# Altium PCB LCD_Dev_PCB1.PcbDoc
Units mil, origin at the board's own origin, x right, y up, seen from the top; angles counter-clockwise.
Board outline 2470 x 1570 mil, 4 copper layers (Top Layer, GND, 3.3V, Bottom Layer), stack 30.634 mil thick; 60 components, 58 nets, 366 pads, 69 vias.
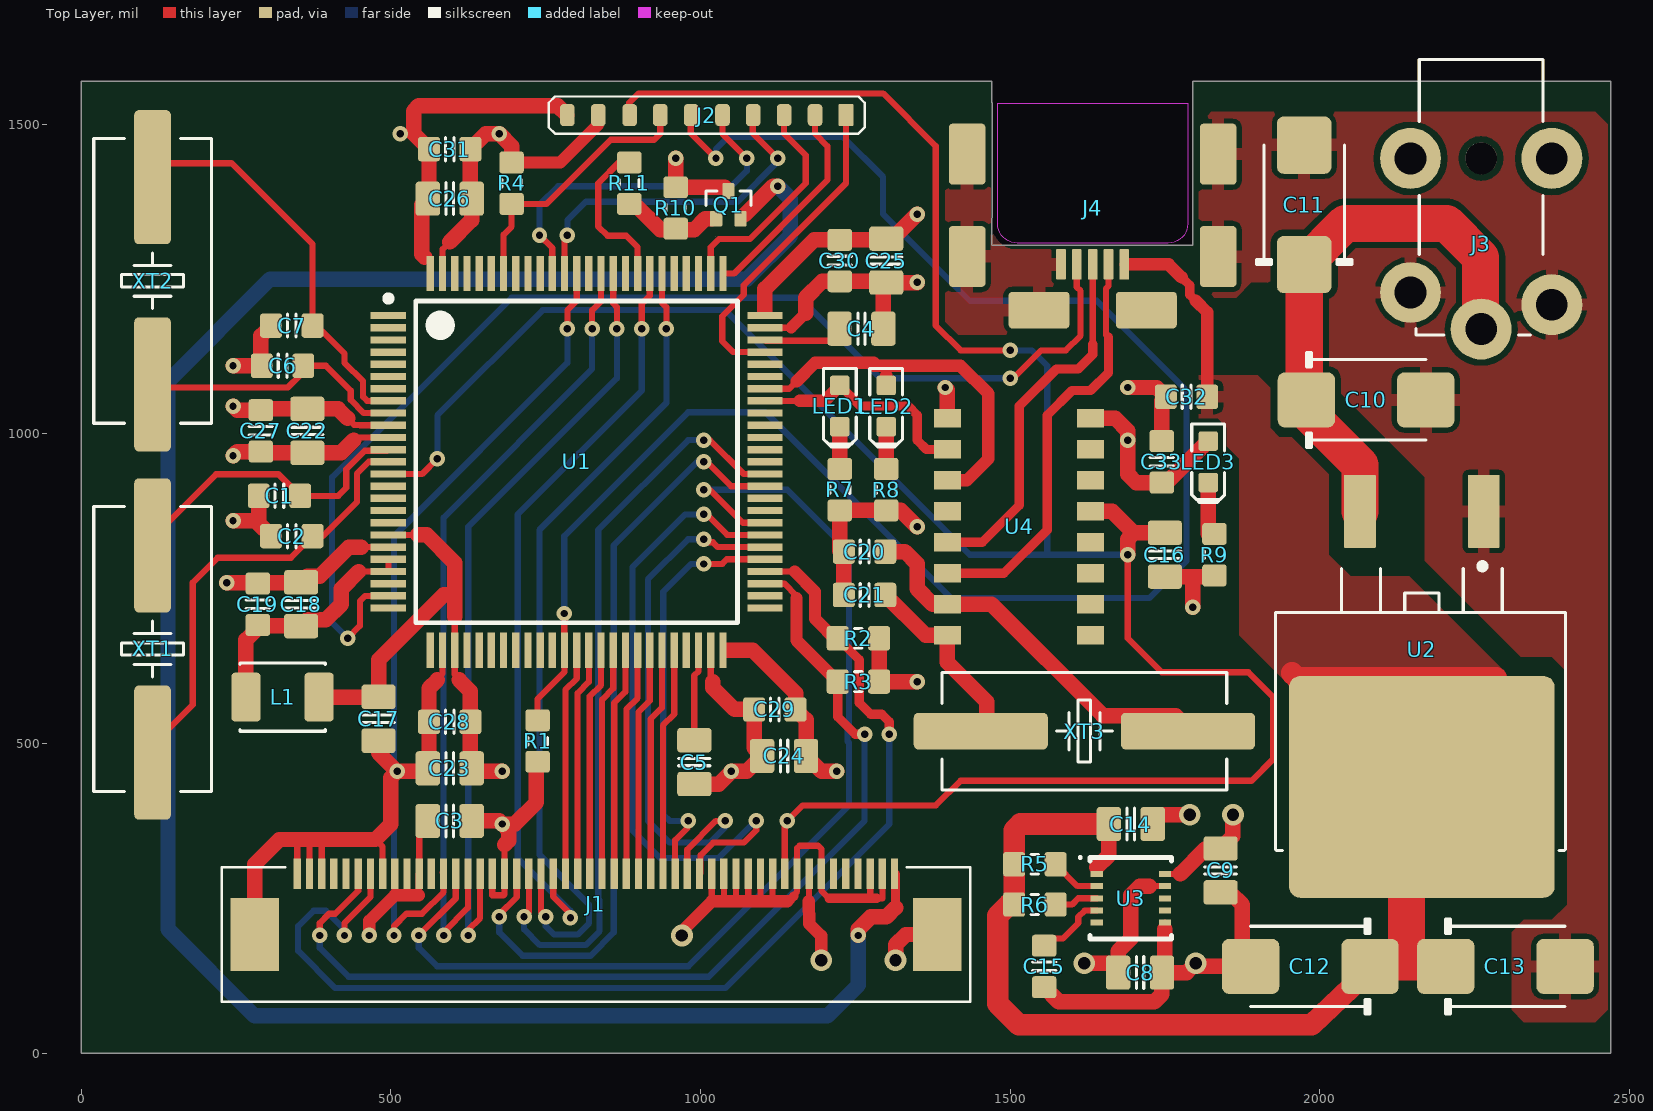
[diagram p0: Top Layer view]
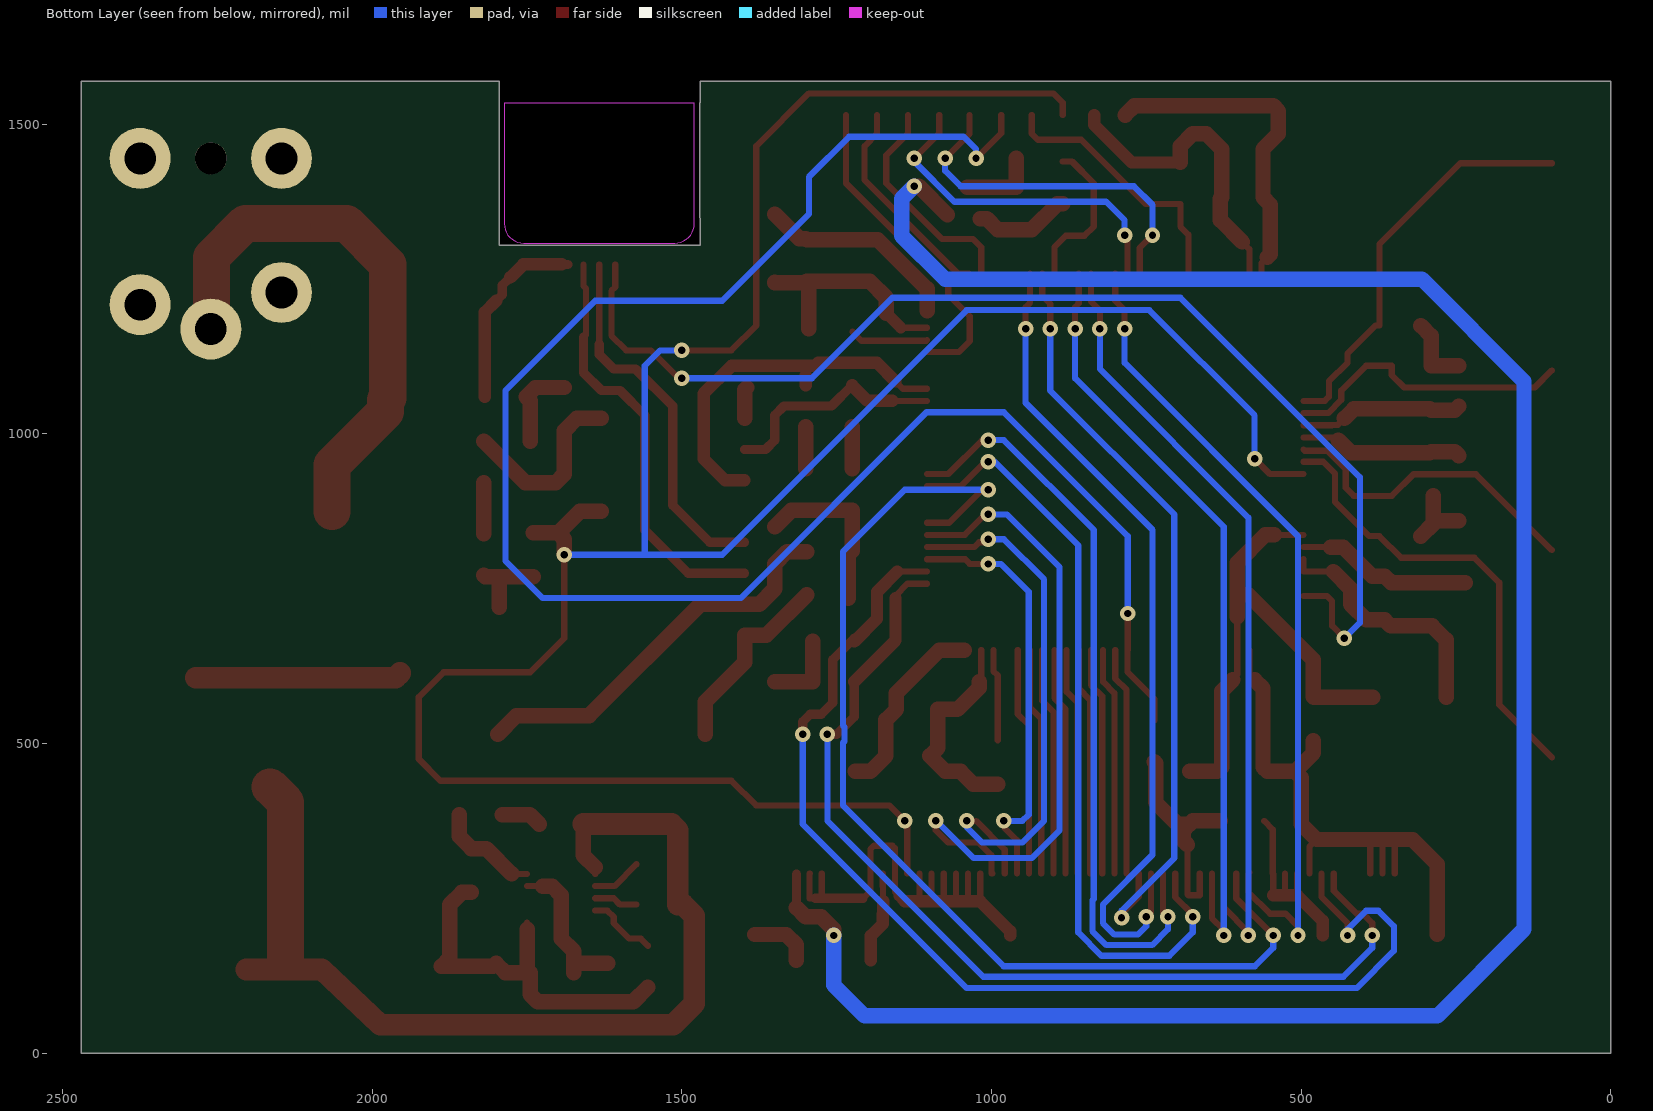
[diagram p1: Bottom Layer view, seen from below]
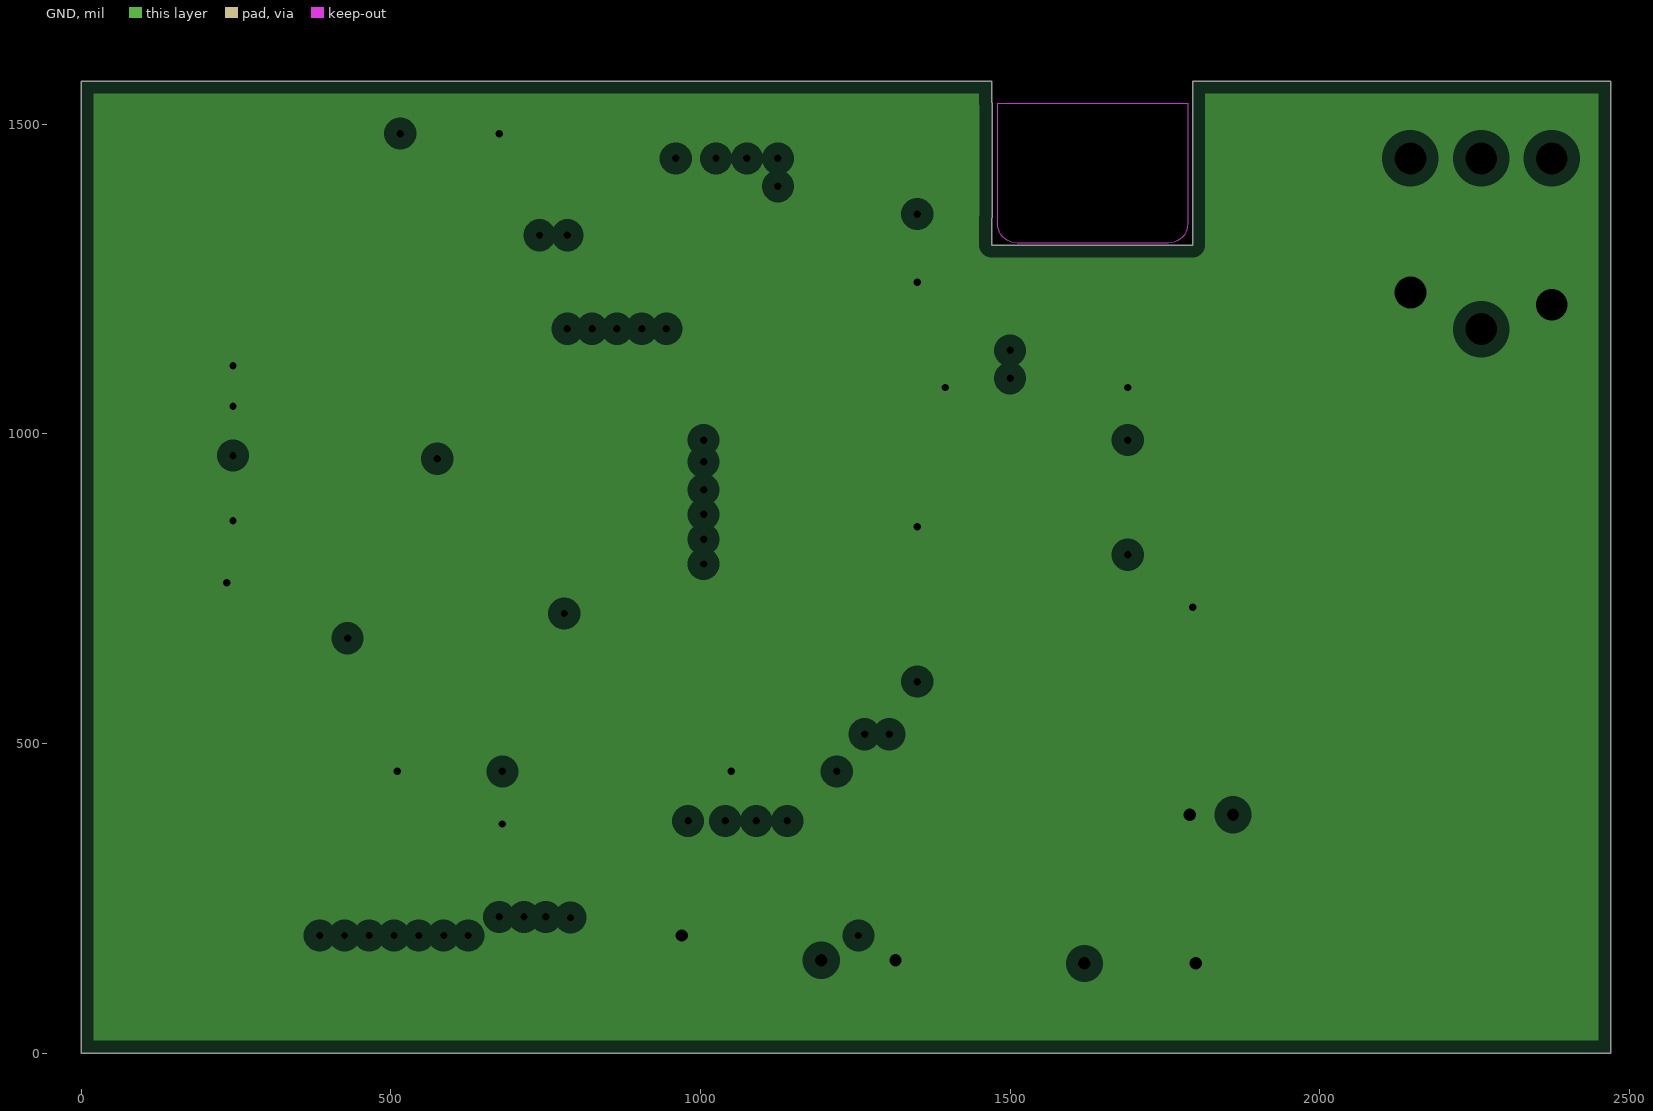
[diagram p2: GND, clearances drawn from the general rule]
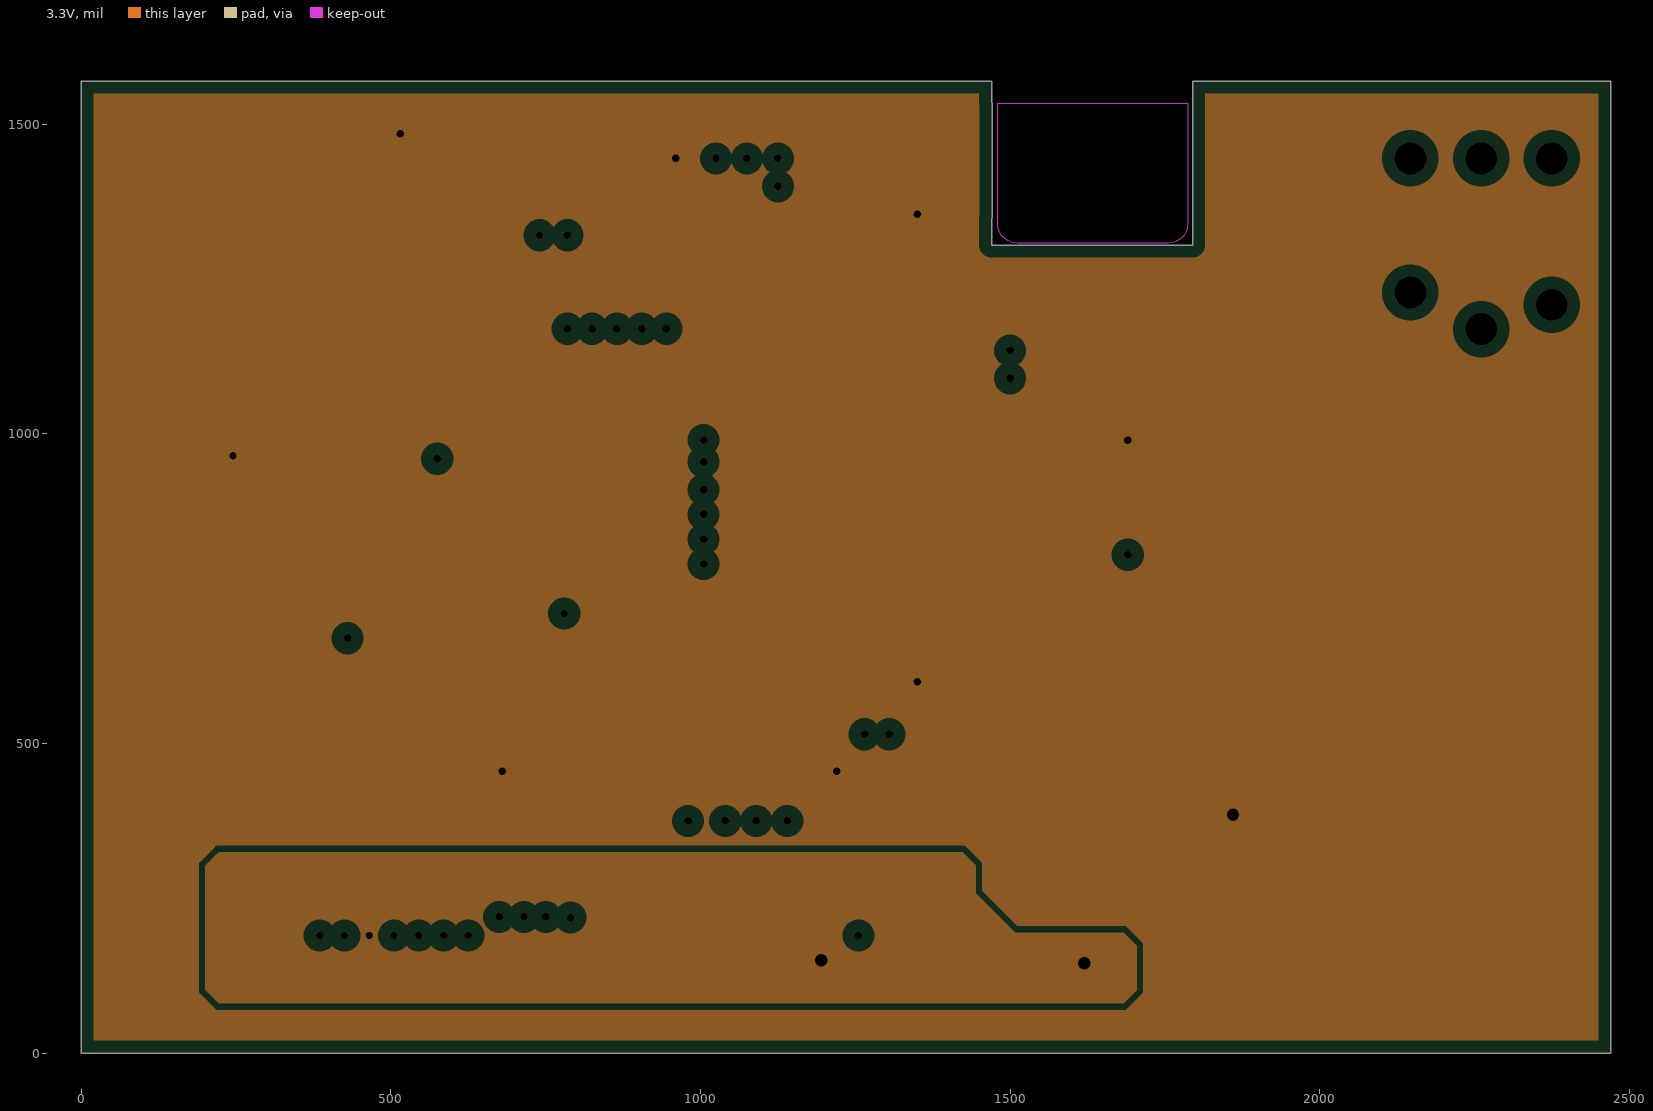
[diagram p3: 3.3V, clearances drawn from the general rule]
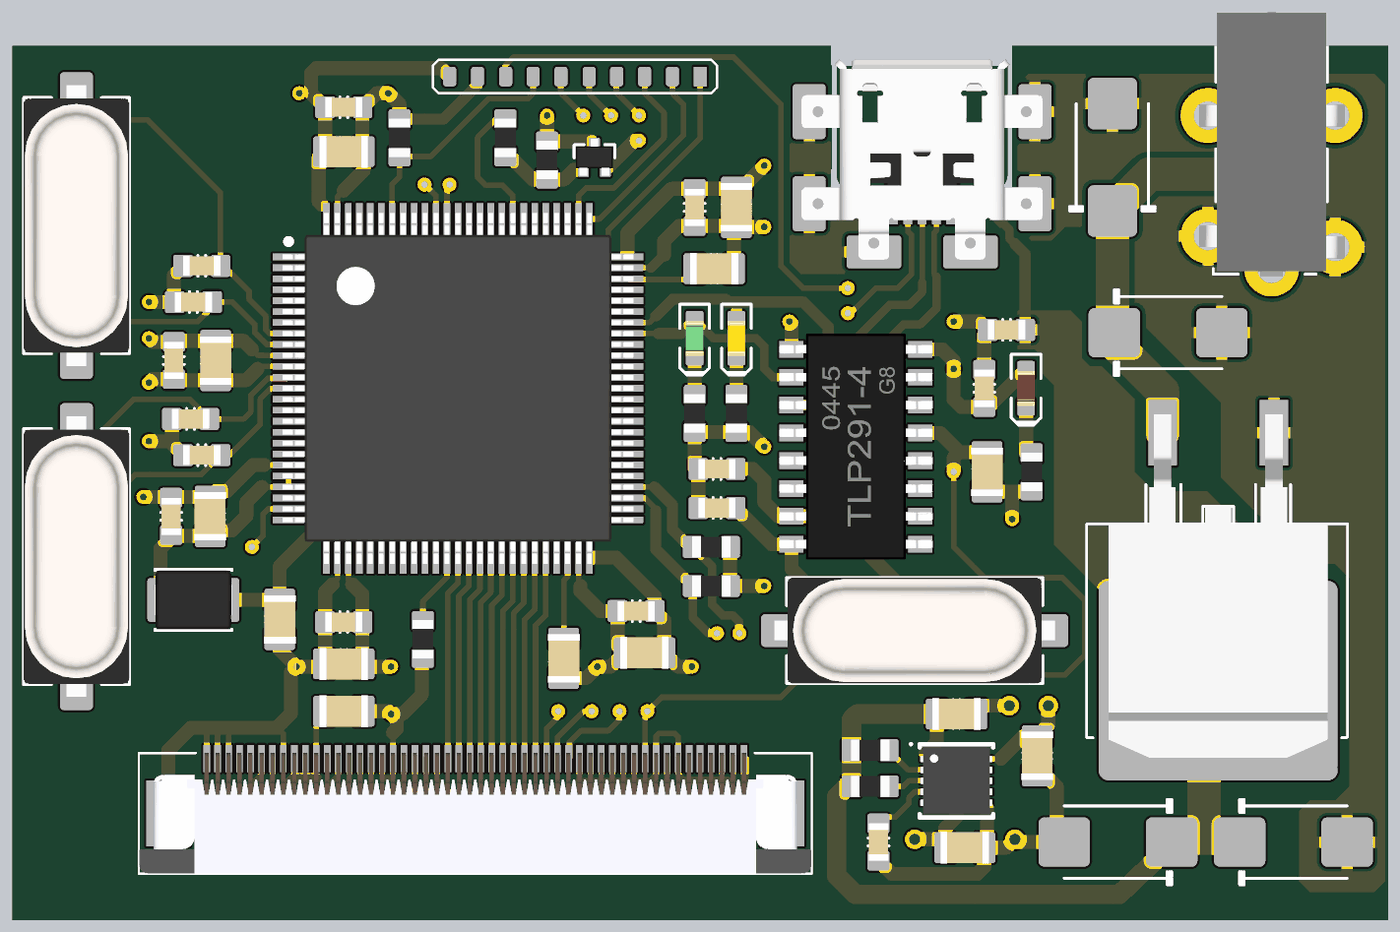
[diagram p4: 3D render of the assembled board from above, using the file's embedded part models]

## Layer stack, top to bottom
Top Solder: solder mask 0.4, Solder Resist, Dk 3.5
Top Layer: signal copper 1.4
Dielectric 1: core 10, FR-4, Dk 4.2
GND: plane copper 1.417, net GND
Dielectric 3: prepreg 5, Dk 4.2
3.3V: plane copper 1.417, net 3.3V
Dielectric 2: core 10, Dk 4.2
Bottom Layer: signal copper 1.4
Bottom Solder: solder mask 0.4, Solder Resist, Dk 3.5

## Board outline
0,0 2470,0 2470,1570 1795,1570 1795,1305 1470,1305 1470,1348 1471,1349 1471,1535 1470,1535 1470,1570 0,1570

## Design rules (kind name [scope] priority, off if disabled: settings)
Clearance [All] p1: gap=10 ignorepadtopadclearanceinfootprint=FALSE except(0: Arc-Hole Track-Hole SMDPad-Hole THPad-Hole Via-Hole Fill-Hole Poly-Hole Region-Hole Text-Hole; 1: SMDPad-Region Region-Region; 5: SMDPad-SMDPad; 7: Arc-Arc Arc-Track Arc-SMDPad Track-Track Track-SMDPad)
ComponentClearance [All] p1: gap=5 collisioncheckmode=3 verticalgap=10 showdistances=FALSE
MinimumSolderMaskSliver [All] p1: minsoldermaskwidth=1
PlaneClearance [All] p1: clearance=20
PlaneConnect [All] p1: planeconnectstyle=Relief reliefexpansion=20 reliefentries=4 reliefconductorwidth=10 reliefairgap=10
PolygonConnect [All] p1: connectstyle=Relief reliefconductorwidth=20 reliefentries=4 polygonreliefangle="90 Angle" airgapwidth=8
RoutingVias [All] p1: holewidth=12 width=25 viastyle="Through Hole" minholewidth=10 minwidth=15 maxholewidth=28 maxwidth=50
SilkToSolderMaskClearance [IsPad] p1: minsilkscreentomaskgap=4 clearancetoexposedcopper=TRUE
SolderMaskExpansion [All] p1: expansion=4
Width [All] p1: maxlimit=100 minlimit=5 preferedwidth=30
25 further rules are at their usual default settings.

## Components (designator, comment, footprint, x,y, rotation, side; value= is the part's Value field where it differs from the comment)
C1 "approved sub OK" CAPC1608X90N 320,900 r180 top value=4p7
C2 "approved sub OK" CAPC1608X90N 340,835 r180 top value=4p7
C3 "approved sub OK" CAPC2012X135N 595,375 r0 top value=4µ7
C4 "approved sub OK" CAPC2012X135N 1260,1170 r0 top value=2µ2
C5 "approved sub OK" CAPC2012X135N 990,470 r270 top value=2µ2
C6 "approved sub OK" CAPC1608X90N 325,1110 r180 top value=4p7
C7 "approved sub OK" CAPC1608X90N 340,1175 r180 top value=4p7
C8 "approved sub OK" CAPC2012X135N 1710,130 r0 top value=1µ
C9 "approved sub OK" CAPC2012X135N 1840,295 r270 top value=1µ
C10 "47µ" CAPMP6032X280N 2075,1055 r0 top
C11 "47µ" CAPMP6032X280N 1975,1370 r90 top
C12 "47µ" CAPMP6032X280N 1985,140 r180 top
C13 "47µ" CAPMP6032X280N 2300,140 r0 top
C14 "approved sub OK" CAPC2012X135N 1695,370 r0 top value=1µ
C15 "approved sub OK" CAPC1608X90N 1555,140 r270 top value=10n
C16 "approved sub OK" CAPC2012X135N 1750,805 r270 top value=1µ
C17 "approved sub OK" CAPC2012X135N 480,540 r270 top value=4µ7
C18 "approved sub OK" CAPC2012X135N 355,725 r90 top value=1µ
C19 "approved sub OK" CAPC1608X90N 285,725 r90 top value=10n
C20 "approved sub OK" CAPC1608X90N 1265,810 r180 top value=4p7
C21 "approved sub OK" CAPC1608X90N 1265,740 r180 top value=4p7
C22 "approved sub OK" CAPC2012X135N 365,1005 r90 top value=1µ
C23 "approved sub OK" CAPC2012X135N 595,460 r180 top value=1µ
C24 "approved sub OK" CAPC2012X135N 1135,480 r180 top value=1µ
C25 "approved sub OK" CAPC2012X135N 1300,1280 r270 top value=1µ
C26 "approved sub OK" CAPC2012X135N 595,1380 r0 top value=1µ
C27 "approved sub OK" CAPC1608X90N 290,1005 r90 top value=10n
C28 "approved sub OK" CAPC1608X90N 595,535 r180 top value=10n
C29 "approved sub OK" CAPC1608X90N 1120,555 r180 top value=10n
C30 "approved sub OK" CAPC1608X90N 1225,1280 r270 top value=10n
C31 "approved sub OK" CAPC1608X90N 595,1460 r0 top value=10n
C32 "approved sub OK" CAPC1608X90N 1785,1060 r180 top value=100n
C33 "approved sub OK" CAPC1608X90N 1745,955 r90 top value=100n
J1 "*" ER-CON50HT-1 1333.07,329.37 r180 top
J2 "*" "SWJ-DP connector" 1265,1545 r180 top
J3 "*" CONN_PWR_JACK_0.7x2.35mm 2260.83,1630.04 r180 top value="0.7mm ID, 2.35mm OD"
J4 "USB Micro Type B" USB_Micro-B_Molex_SMD 1633.39,1528.74 r270 top
L1 "SMD-322522" INDM3225X240N 325,575 r180 top value=22µ
LED1 "Green" LED-0603-GREEN 1225,1045 r270 top
LED2 "Yellow" LED-0603-YELLOW 1300,1045 r270 top
LED3 "Red" LED-0603-RED 1820,955 r270 top
Q1 "P-Channel" SOT523F 1045,1370 r90 top
R1 "Thick Film" RESC1608X55N 737,504 r270 top value=10K
R2 "Thick Film" RESC1608X55N 1255,670 r180 top value=2K2
R3 "Thick Film" RESC1608X55N 1255,600 r180 top value=2K2
R4 "Thick Film" RESC1608X55N 695,1405 r90 top value=10K
R5 "Thick Film" RESC1608X55N 1540,305 r0 top value=2K2
R6 "Thick Film" RESC1608X55N 1540,240 r0 top value=2K2
R7 "Thick Film" RESC1608X55N 1225,910 r270 top value=2K2
R8 "Thick Film" RESC1608X55N 1300,910 r270 top value=2K2
R9 "Thick Film" RESC1608X55N 1830,805 r270 top value=2K2
R10 "Thick Film" RESC1608X55N 960,1365 r270 top value=10K
R11 "Thick Film" RESC1608X55N 885,1405 r90 top value=330R
U1 "*" LQFP100_STM32F4 730,1015 r0 top
U2 "AP1086" TO263-3L 2165,652.5 r90 top
U3 "*" 10LD3X3DFN 1695,250 r0 top
U4 "*" SOP16 1198.9,875 r0 top
XT1 "6.00MHz" CRYSTAL_HC49-US-SM 115,652.68 r270 top
XT2 "6.00MHz" CRYSTAL_HC49-US-SM 115,1247.32 r90 top
XT3 "6.00MHz" CRYSTAL_HC49-US-SM 1620,520 r180 top

## Footprints (in the part's own frame and the unit in brackets; to place one, negate y for a bottom-side part, rotate by r counter-clockwise, add the part's x,y. Pads: shape width x height; smd on the part's side, far side on the other; paste and mask are expansions set on the pad)
10LD3X3DFN [mm] "10 PIN DFPNL (DFN) Body 3x3mm, Pitch 0.50mm, IPC Medium Density"
  rect 0.5x0.25 smd: 1(-1.4,1) 2(-1.4,0.5) 3(-1.4,0) 4(-1.4,-0.5) 5(-1.4,-1) 6(1.4,-1) 7(1.4,-0.5) 8(1.4,0) 9(1.4,0.5) 10(1.4,1)
  silkscreen extent -2.12,-1.68 1.68,1.72, body extent -1.63,-1.53 1.63,1.53, height 0.9
CAPC1608X90N [mm] "Chip Capacitor, Body 1.6x0.8mm, EIA 0603, IPC Medium Density"
  round 0.254 on Mech15: 0(0,0)
  rrect25% 0.9x1 smd: 1(-0.85,0) 2(0.85,0)
  Top Layer pour cut-out: -0.6,0.5 -0.4,0.7 0.4,0.7 0.6,0.5 0.6,-0.5 0.4,-0.7 -0.4,-0.7 -0.6,-0.5
  silkscreen extent -0.18,-0.48 0.18,0.48, body extent -0.85,-0.45 0.85,0.45, height 0.89
CAPC2012X135N [mm] "Chip Capacitor, Body 2.0x1.2mm, EIA 0805, IPC Medium Density"
  round 0.254 on Mech15: 0(0,0)
  rrect25% 1x1.4 smd: 1(-0.9,0) 2(0.9,0)
  Top Layer pour cut-out: -0.675,0.7 -0.475,0.9 0.475,0.9 0.675,0.7 0.675,-0.7 0.475,-0.9 -0.475,-0.9 -0.675,-0.7
  silkscreen extent -0.15,-0.65 0.15,0.65, body extent -1.1,-0.72 1.1,0.73, height 1.34
CAPMP6032X280N [mm] "Capacitor, polarized, Molded Body, EIA 535BAAC size C; 6.00mm L X 3.20mm W X 2.80mm H"
  round 0.508 on Mech15: 0(0,0)
  rrect25% 2.35x2.25 smd: 1(-2.45,0) 2(2.45,0)
  silkscreen extent -2.45,-1.95 2.45,1.95, body extent -3,-1.6 3,1.6, height 2.8
CONN_PWR_JACK_0.7x2.35mm [mm] "Power Connector, 0.7mm ID, 2.35mm OD"
  round 2.5 hole 1.3: 1(0,11.7) 2(-2.9,10.7) 3(2.9,10.2) MH(-2.9,4.7) MH(2.9,4.7)
  round 1.3 hole 1.3 unplated: MH(0,4.7)
  silkscreen extent -2.54,0.63 2.67,11.94, body extent -3.31,0 3.31,12.05, height 5
CRYSTAL_HC49-US-SM [mm] "SMD Crystal HC49/US-SM package"
  round 0.508 on Mech15: 0(0,0)
  rrect25% 5.5x1.5 smd: 1(-4.25,0) 2(4.25,0)
  silkscreen extent -5.84,-2.41 5.84,2.41, body extent -6.4,-2.41 6.4,2.42, height 4.29
ER-CON50HT-1 [mm] "50 pins 0.5mm pitch SMD horizontal type FPC ZIF"
  rect 0.3x1.25 smd: 1(0.5,1) 2(1,1) 3(1.5,1) 4(2,1) 5(2.5,1) 6(3,1) 7(3.5,1) 8(4,1) 9(4.5,1) 10(5,1) 11(5.5,1) 12(6,1) 13(6.5,1) 14(7,1) 15(7.5,1) 16(8,1) 17(8.5,1) 18(9,1) 19(9.5,1) 20(10,1) 21(10.5,1) 22(11,1) 23(11.5,1) 24(12,1) 25(12.5,1) 26(13,1) 27(13.5,1) 28(14,1) 29(14.5,1) 30(15,1) 31(15.5,1) 32(16,1) 33(16.5,1) 34(17,1) 35(17.5,1) 36(18,1) 37(18.5,1) 38(19,1) 39(19.5,1) 40(20,1) 41(20.5,1) 42(21,1) 43(21.5,1) 44(22,1) 45(22.5,1) 46(23,1) 47(23.5,1) 48(24,1) 49(24.5,1) 50(25,1)
  rect 2x3 smd: 51(-1.25,3.5) 52(26.75,3.5)
  silkscreen extent -2.6,0.75 28.1,6.25, body extent -2.57,0.75 28.08,6.25, height 2.06
INDM3225X240N [mm] "Molded Inductor, 2-Leads, Body 3.2x2.5mm, IPC Medium Density"
  round 0.508 on Mech15: 0(0,0)
  rrect25% 1.2x2 smd: 1(-1.5,0) 2(1.5,0)
  silkscreen extent -1.75,-1.4 1.75,1.4, body extent -1.79,-1.35 1.79,1.35, height 2.4
LED-0603-GREEN [mm]
  round 0.254 on Mech15: 0(0,0)
  rrect25% 0.8x0.8 smd: A(-0.85,0) K(0.85,0)
  Top Layer pour cut-out: -0.5,0.5 0.5,0.5 0.5,-0.5 -0.5,-0.5
  silkscreen extent -1.55,-0.67 1.68,0.67, body extent -0.8,-0.4 0.8,0.4, height 0.75
LED-0603-RED [mm]
  round 0.254 on Mech15: 0(0,0)
  rrect25% 0.8x0.8 smd: A(-0.85,0) K(0.85,0)
  Top Layer pour cut-out: -0.5,0.5 0.5,0.5 0.5,-0.5 -0.5,-0.5
  silkscreen extent -1.55,-0.67 1.68,0.67, body extent -0.8,-0.4 0.8,0.4, height 0.75
LED-0603-YELLOW [mm]
  round 0.254 on Mech15: 0(0,0)
  rrect25% 0.8x0.8 smd: A(-0.85,0) K(0.85,0)
  Top Layer pour cut-out: -0.5,0.5 0.5,0.5 0.5,-0.5 -0.5,-0.5
  silkscreen extent -1.55,-0.67 1.68,0.67, body extent -0.8,-0.4 0.8,0.4, height 0.75
LQFP100_STM32F4 [mm] "TSQFP, 100-Leads, Body 14.00x14.00mm, Pitch 0.50mm, IPC Medium Density"
  rect 1.45x0.3 smd: 1(-5.947,4.476) 2(-5.947,3.976) 3(-5.947,3.476) 4(-5.947,2.976) 5(-5.947,2.476) 6(-5.947,1.976) 7(-5.947,1.476) 8(-5.947,0.976) 9(-5.947,0.476) 10(-5.947,-0.024) 11(-5.947,-0.524) 12(-5.947,-1.024) 13(-5.947,-1.524) 14(-5.947,-2.024) 15(-5.947,-2.524) 16(-5.947,-3.024) 17(-5.947,-3.524) 18(-5.947,-4.024) 19(-5.947,-4.524) 20(-5.947,-5.024) 21(-5.947,-5.524) 22(-5.947,-6.024) 23(-5.947,-6.524) 24(-5.947,-7.024) 25(-5.947,-7.524) 51(9.503,-7.524) 52(9.503,-7.024) 53(9.503,-6.524) 54(9.503,-6.024) 55(9.503,-5.524) 56(9.503,-5.024) 57(9.503,-4.524) 58(9.503,-4.024) 59(9.503,-3.524) 60(9.503,-3.024) 61(9.503,-2.524) 62(9.503,-2.024) 63(9.503,-1.524) 64(9.503,-1.024) 65(9.503,-0.524) 66(9.503,-0.024) 67(9.503,0.476) 68(9.503,0.976) 69(9.503,1.476) 70(9.503,1.976) 71(9.503,2.476) 72(9.503,2.976) 73(9.503,3.476) 74(9.503,3.976) 75(9.503,4.476)
  rect 0.3x1.45 smd: 26(-4.222,-9.249) 27(-3.722,-9.249) 28(-3.222,-9.249) 29(-2.722,-9.249) 30(-2.222,-9.249) 31(-1.722,-9.249) 32(-1.222,-9.249) 33(-0.722,-9.249) 34(-0.222,-9.249) 35(0.278,-9.249) 36(0.778,-9.249) 37(1.278,-9.249) 38(1.778,-9.249) 39(2.278,-9.249) 40(2.778,-9.249) 41(3.278,-9.249) 42(3.778,-9.249) 43(4.278,-9.249) 44(4.778,-9.249) 45(5.278,-9.249) 46(5.778,-9.249) 47(6.278,-9.249) 48(6.778,-9.249) 49(7.278,-9.249) 50(7.778,-9.249) 76(7.778,6.201) 77(7.278,6.201) 78(6.778,6.201) 79(6.278,6.201) 80(5.778,6.201) 81(5.278,6.201) 82(4.778,6.201) 83(4.278,6.201) 84(3.778,6.201) 85(3.278,6.201) 86(2.778,6.201) 87(2.278,6.201) 88(1.778,6.201) 89(1.278,6.201) 90(0.778,6.201) 91(0.278,6.201) 92(-0.222,6.201) 93(-0.722,6.201) 94(-1.222,6.201) 95(-1.722,6.201) 96(-2.222,6.201) 97(-2.722,6.201) 98(-3.222,6.201) 99(-3.722,6.201) 100(-4.222,6.201)
  silkscreen extent -6.07,-8.12 8.38,5.3, body extent -6.22,-9.52 9.78,6.48, height 1.6
RESC1608X55N [mm] "Chip Resistor, Body 1.6x0.8mm, EIA 0603, IPC Medium Density"
  round 0.254 on Mech15: 0(0,0)
  rrect25% 0.9x1 smd: 1(-0.85,0) 2(0.85,0)
  Top Layer pour cut-out: -0.6,0.5 -0.4,0.7 0.4,0.7 0.6,0.5 0.6,-0.5 0.4,-0.7 -0.4,-0.7 -0.6,-0.5
  silkscreen extent -0.15,-0.41 0.15,0.41, body extent -0.87,-0.47 0.88,0.48, height 0.54
SOP16 [mm]
  rect 1.1x0.76 smd: 1(5.08,3.81) 2(5.08,2.54) 3(5.08,1.27) 4(5.08,0) 5(5.08,-1.27) 6(5.08,-2.54) 7(5.08,-3.81) 8(5.08,-5.08) 9(10.95,-5.08) 10(10.95,-3.81) 11(10.95,-2.54) 12(10.95,-1.27) 13(10.95,0) 14(10.95,1.27) 15(10.95,2.54) 16(10.95,3.81)
  body extent 4.51,-5.78 11.51,4.52, height 2.1
SOT523F [mm] "3 Lead SC89; EIAJ-SC89; SOT523F"
  round 0.254 on Mech15: 0(0,0)
  rrect25% 0.65x0.5 smd: 1(-0.57,0.5) 2(-0.57,-0.5) 3(0.57,0)
  Top Layer pour cut-out: -0.425,0.775 0.425,0.775 0.425,-0.775 -0.425,-0.775
  silkscreen extent -0.03,-0.92 0.58,0.92, body extent -0.85,-0.85 0.85,0.85, height 0.8
"SWJ-DP connector" [mm] "10 pin SWJ-DP PCB connector"
  rrect8% 0.6x0.9 smd: 1(0.762,0.762)
  rrect50% 0.6x0.9 smd: 2(2.032,0.762) 3(3.302,0.762) 4(4.572,0.762) 5(5.826,0.762) 6(7.112,0.762) 7(8.382,0.762) 8(9.636,0.762) 9(10.922,0.762) 10(12.192,0.762)
  silkscreen extent 0,0 12.95,1.52
TO263-3L [mm] "D-PAK/TO-263-3; 3 Leads (1 Cropped); Body 14.7 (inc. leads) x 10.2 mm (LxW max)"
  rrect5% 3x1.3 smd: 1(5.651,-2.54) 3(5.651,2.54)
  rrect10% 9.1x10.9 smd: 2(-5.651,0)
  silkscreen extent -8.25,-5.9 3.52,6, body extent -9.18,-5 6.49,5, height 4.81
USB_Micro-B_Molex_SMD [mm]
  round 0.508 on Mech15: 0(0,0)
  rrect20% 1.25x0.4 smd: 1(6.475,1.3) 2(6.475,0.65) 3(6.475,0) 4(6.475,-0.65) 5(6.475,-1.3)
  rrect20% 2.5x1.5 smd: SH(1.95,5.15) SH(1.95,-5.15) SH(6.15,5.15) SH(6.15,-5.15)
  rrect20% 1.5x2.5 smd: SH(8.35,-2.2) SH(8.35,2.2)
  Keep-Out Layer board cut-out: -0.127,3.9 4.8,3.9 5.106,3.839 5.366,3.666 5.539,3.406 5.6,3.1 5.6,3.1 5.6,-3.1 5.539,-3.406 5.366,-3.666 5.106,-3.839 4.8,-3.9 4.8,-3.9 -0.127,-3.9
  body extent -0.43,-5.5 8.7,5.5, height 1.43

## Part data
C1 C2 C6 C7 C20 C21: library part CAPC_4p7_100V_0603, "Capacitor SMD Cer 4.7pF ±0.25pF 100V NP0 0603", Manufacturer 1="AVX Corporation", Manufacturer Part Number 1=06031A4R7CAT2A, Operating Temperature="-55°C ~ 125°C", Package / Case="0603 (1608 metric)", Ratings="100V; NP0", Supplier Part Number 1=478-4992-1-ND, Tolerance=±0.25pF, SCDType=source*, Supplier 1=Digi-Key
C3 C17: library part CAPC_4u7_0805, "Capacitor SMD Cer 4.7uF 10% 16V X5R 0805", Manufacturer 1="Taiyo Yuden", Manufacturer 2="Samsung Electro-Mechanics America, Inc", Manufacturer 3=Kemet, Manufacturer 4="Murata Electronics North America", Manufacturer 5="TDK Corporation", Manufacturer Part Number 1=EMK212BJ475KG-T, Manufacturer Part Number 2=CL21A475KOFNNNE, Manufacturer Part Number 3=C0805C475K4PACTU, Manufacturer Part Number 4=GRM21BR61C475MA88L, Manufacturer Part Number 5=C2012X5R1C475K125AC, Operating Temperature="-55°C ~ 85°C", Package / Case="0805 (2012 Metric)", Ratings="16V; X5R", Supplier Part Number 1=587-1294-1-ND, Tolerance=±10%, ComponentLink1Description=http://www.yuden.co.jp/productdata/catalog/en/mlcc01_e.pdf, ComponentLink1URL=http://www.yuden.co.jp/productdata/catalog/en/mlcc01_e.pdf, ComponentLink2Description=http://www.samsungsem.com/servlet/FileDownload?type=spec&file=CL21A475KOFNNNE.pdf, ComponentLink2URL=http://www.samsungsem.com/servlet/FileDownload?type=spec&file=CL21A475KOFNNNE.pdf, ComponentLink3Description=http://capacitoredge.kemet.com/capedge2/DataSheet?pn=C0805C475K4PACTU, ComponentLink3URL=http://capacitoredge.kemet.com/capedge2/DataSheet?pn=C0805C475K4PACTU, ComponentLink4Description=http://psearch.murata.com/capacitor/product/GRM21BR61C475MA88#.pdf, ComponentLink4URL=http://psearch.murata.com/capacitor/product/GRM21BR61C475MA88#.pdf, ComponentLink5Description=http://product.tdk.com/capacitor/mlcc/en/documents/mlcc_commercial_general_en.pdf, ComponentLink5URL=http://product.tdk.com/capacitor/mlcc/en/documents/mlcc_commercial_general_en.pdf, Material=ceramic, RoHS 1="RoHS Compliant", RoHS 2="RoHS Compliant", RoHS 3="RoHS Compliant", RoHS 4="RoHS Compliant", RoHS 5="RoHS Compliant", SCDType=spec, Size / Dimension="0.079\" L x 0.049\" W (2.00mm x 1.25mm)", Supplier 1=Digi-Key, Supplier 2=Digi-Key, Supplier 3=Digi-Key, Supplier 4=Digi-Key, Supplier 5=Digi-Key, Supplier Part Number 2=1276-1065-1-ND, Supplier Part Number 3=399-8101-1-ND, Supplier Part Number 4=490-7215-1-ND, Supplier Part Number 5=445-7640-1-ND, Thickness (Max)="0.053\" (1.35mm)"
C4 C5: library part CAPC_2u2_0805, "Capacitor SMD Cer 2.2uF 10% 16V X7R 0805", Manufacturer 1=Kemet, Manufacturer Part Number 1=C0805C225K4RACTU, Package / Case="0805 (2012 metric)", Ratings="16V; X7R", Supplier Part Number 1=399-3523-1-ND, Tolerance=±10%, SCDType=undef, Supplier 1=Digi-Key
C8 C9 C14 C16 C18 C22 C23 C24 C25 C26: library part CAPC_1u_0805_X7R_16V_10%, "Capacitor SMD Cer 1uF 10% 16V X7R 0805", Manufacturer 1=Yageo, Manufacturer 2=Kemet, Manufacturer 3="Samsung Electro-Mechanics America, Inc", Manufacturer 4="TDK Corporation", Manufacturer Part Number 1=CC0805KKX7R7BB105, Manufacturer Part Number 2=C0805C105K4RACTU, Manufacturer Part Number 3=CL21B105KOFNNNE, Manufacturer Part Number 4=C2012X7R1C105K125AA, Package / Case="0805 (2012 metric)", Ratings="16V; X7R", Supplier Part Number 1=311-1365-6-ND, Temperature Coefficient=X7R, Tolerance=±10%, ComponentLink1Description=http://www.yageo.com/documents/recent/UPY-GPHC_X7R_6.3V-to-50V_8.pdf, ComponentLink1URL=http://www.yageo.com/documents/recent/UPY-GPHC_X7R_6.3V-to-50V_8.pdf, ComponentLink2Description=http://www.kemet.com/datasheets&C0805C105K4RACTU, ComponentLink2URL=http://www.kemet.com/datasheets&C0805C105K4RACTU, ComponentLink3Description=http://www.samsungsem.com/servlet/FileDownload?type=spec&file=CL21B105KOFNNNE.pdf, ComponentLink3URL=http://www.samsungsem.com/servlet/FileDownload?type=spec&file=CL21B105KOFNNNE.pdf, ComponentLink4Description=http://product.tdk.com/capacitor/mlcc/en/documents/mlcc_commercial_general_en.pdf, ComponentLink4URL=http://product.tdk.com/capacitor/mlcc/en/documents/mlcc_commercial_general_en.pdf, Material=ceramic, RoHS 1="RoHS Compliant", RoHS 2="RoHS Compliant", RoHS 3="RoHS Compliant", RoHS 4="RoHS Compliant", SCDType=spec, Supplier 1=Digi-Key, Supplier 2=Digi-Key, Supplier 3=Digi-Key, Supplier 4=Digi-Key, Supplier Part Number 2=399-1284-6-ND, Supplier Part Number 3=1276-1026-6-ND, Supplier Part Number 4=445-1358-6-ND
C10 C11 C12 C13: library part CAPT_47u_6032_16V, "Capacitor SMD Tantalum 47uF 10% 16V 6032-28", Manufacturer 1=Vishay/Sprague, Manufacturer Part Number 1=TR3C476K016C0300, Package / Case="EIA 535BAAC size C", Ratings=16V, Supplier Part Number 1=718-1332-1-ND, Tolerance=±10%, Material=Tantalum, SCDType=undef, Supplier 1=Digi-Key
C15 C19 C27 C28 C29 C30 C31: library part CAPC_10n_0603_X7R_50V_10%, "Capacitor SMD Cer 10nF 10% 50V X7R 0603", Manufacturer 1="TDK Corporation", Manufacturer 2="AVX Corporation", Manufacturer Part Number 1=C1608X7R1H103K, Manufacturer Part Number 2=06035C103KAT2A, Package / Case="0603 (1608 metric)", Ratings="50V; X7R", Supplier Part Number 1=445-1311-1-ND, Tolerance=±10%, ComponentLink1Description=http://product.tdk.com/capacitor/mlcc/en/documents/mlcc_commercial_general_en.pdf, ComponentLink1URL=http://product.tdk.com/capacitor/mlcc/en/documents/mlcc_commercial_general_en.pdf, ComponentLink2Description=http://www.avx.com/docs/Catalogs/cx7r.pdf, ComponentLink2URL=http://www.avx.com/docs/Catalogs/cx7r.pdf, Material=ceramic, SCDType=spec, Supplier 1=Digi-Key, Supplier 2=Digi-Key, Supplier Part Number 2=478-1227-1-ND
C32 C33: library part CAPC_100n_0603_X7R_50V_10%, "Capacitor SMD Cer 100nF 10% 50V X7R 0603", Manufacturer 1="AVX Corporation", Manufacturer 2="TDK Corporation", Manufacturer Part Number 1=06035C104KAT2A, Manufacturer Part Number 2=C1608X7R1H104K, Package / Case="0603 (1608 Metric)", Ratings="50V; X7R", Supplier Part Number 1=478-5052-1-ND, Tolerance=±10%, ComponentLink1Description=http://www.avx.com/docs/Catalogs/cx7r.pdf, ComponentLink1URL=http://www.avx.com/docs/Catalogs/cx7r.pdf, ComponentLink2Description=http://product.tdk.com/capacitor/mlcc/en/documents/mlcc_commercial_general_en.pdf, ComponentLink2URL=http://product.tdk.com/capacitor/mlcc/en/documents/mlcc_commercial_general_en.pdf, Material=ceramic, SCDType=spec, Supplier 1=Digi-Key, Supplier 2=Digi-Key, Supplier Part Number 2=445-1314-1-ND
J1: library part LCD-Port, "3.5”TFT LCD Display Port (i80/6800/FSMC etc)"
J2: library part "SWJ-Debug Port", "10 pin Serial Wire JTAG Debug Port"
J3: library part CONN_PWR_JACK_0.7x2.35mm, "Connector Power THT 0.7mm ID x 2.35mm OD", Manufacturer 1=Kobiconn, Manufacturer Part Number 1=163-4307-E, Package / Case="PCB mount", Category=Connectors, HELPURL=http://www.mouser.com/ProductDetail/Kobiconn/163-4307-E/?qs=FrCfMICDGNKiKC02lNlE3g%3D%3D, Mounting Type="Through Hole", SCDType=undef
J4: library part USB_Micro_TypeB, "Connector SMD USB Micro Type B middle mount", Manufacturer 1="Molex Inc", Manufacturer Part Number 1=47491-0001, Package / Case=SMD, Supplier Part Number 1=WM17142CT-ND, SCDType=undef, Supplier 1=Digi-Key
L1: library part INDC_22u_1210_110mA, "Inductor 22uH 110mA 1210 SMD chip", DC Resistance (DCR)="3.7 Ohm", Frequency - Self Resonant=20MHz, Frequency - Test=2.52MHz, Manufacturer 1=3L, Manufacturer Part Number 1=SMD-322522-220K, Operating Temperature="-20°C ~ 80°C", Package / Case="1210 (3225 Metric)", Q @ Freq="30 @ 2.52MHz", Ratings="110 mAdc", Tolerance=±10%, SCDType=source, Supplier 1="APlus Products", Supplier Part Number 1=SMD-322522-220K, Type="Ferrite Core"
LED1: library part LED_SMD_Green_0603_570nm, "LED 0603 SMD Green 570nm 50mcd 20mA", Current - Test=20mA, Manufacturer 1="Kingbright Company LLC", Manufacturer Part Number 1=APT1608CGCK, Package / Case="0603 (1608 metric)", Ratings="20mcd min; 50 mcd typ; 570 nm", Supplier Part Number 1=754-1116-1-ND, Voltage - Forward (Vf) @ 10mA=2.0V, Voltage - Forward (Vf) Typ=2.1V, Color=Green, ComponentLink1Description=http://www.us.kingbright.com/images/catalog/SPEC/APT1608CGCK.pdf, ComponentLink1URL=http://www.us.kingbright.com/images/catalog/SPEC/APT1608CGCK.pdf, Lens Style/Size="Rectangle with Flat Top, 1.1mm x 0.8mm", Lens Type=Clear, Material=AlGaInP, RoHS 1="RoHS Compliant", SCDType=source, Supplier 1=Digi-Key, Viewing Angle=120°, Wavelength - Dominant=570nm, Wavelength - Peak=574nm
LED2: library part LED_SMD_Yellow_0603_150mcd, "LED 0603 SMD Yellow 590nm 150mcd 20mA", Manufacturer 1="Kingbright Company LLC", Manufacturer Part Number 1=APT1608SYCK, Package / Case="0603 (1608 metric)", Ratings="150 mcd; 590 nm", Supplier Part Number 1=754-1124-1-ND, Voltage - Forward (Vf) @ 10mA=1.95V, Voltage - Forward (Vf) Typ=2V, ComponentLink1Description=http://www.us.kingbright.com/images/catalog/SPEC/APT1608SYCK.pdf, ComponentLink1URL=http://www.us.kingbright.com/images/catalog/SPEC/APT1608SYCK.pdf, Material="AlGaInP on GaAs", SCDType=source, Supplier 1=Digi-Key
LED3: library part LED_SMD_Red_0603_220mcd, "LED 0603 SMD Hyper Red 630nm 220mcd 20mA", Manufacturer 1="Kingbright Company LLC", Manufacturer Part Number 1=APT1608SURCK, Package / Case="0603 (1608 metric)", Ratings="220 mcd; 630 nm", Supplier Part Number 1=754-1123-1-ND, Voltage - Forward (Vf) @ 10mA=1.9V, Voltage - Forward (Vf) Typ=1.95V, ComponentLink1Description=http://www.us.kingbright.com/images/catalog/SPEC/APT1608SURCK.pdf, ComponentLink1URL=http://www.us.kingbright.com/images/catalog/SPEC/APT1608SURCK.pdf, Material="AlGaInP on GaAs", SCDType=source, Supplier 1=Digi-Key
Q1: library part MOSFET_P-CH_NTE4151PT1G, "MOSFET SMD P-CH 20V 0.76A 0.313W SOT523F", Manufacturer 1="ON Semiconductor", Manufacturer Part Number 1=NTE4151PT1G, Package / Case="SC-89, SOT523F", Ratings="20V; 760mA; 313mW", Supplier Part Number 1=NTE4151PT1GOSCT-ND, ComponentLink1Description=http://www.onsemi.com/pub_link/Collateral/NTA4151P-D.PDF, ComponentLink1URL=http://www.onsemi.com/pub_link/Collateral/NTA4151P-D.PDF, Rds On (Max) @ Id, Vgs="360 mOhm @ 350mA, 4.5V", SCDType=source, Supplier 1=Digi-Key
R1 R4 R10: library part RES_10K_0603_5%, "Resistor SMD chip 10k Ohm 0.1W 5% 0603", Manufacturer 1=Yageo, Manufacturer 2="Vishay Dale", Manufacturer Part Number 1=RC0603JR-0710KL, Manufacturer Part Number 2=CRCW060310K0JNEA, Package / Case="0603 (1608 metric)", Ratings="1/10 W", Supplier Part Number 1=311-10KGRCT-ND, Tolerance=±5%, ComponentLink1Description=http://www.yageo.com/documents/recent/PYu-RC0603_51_RoHS_L_4.pdf, ComponentLink1URL=http://www.yageo.com/documents/recent/PYu-RC0603_51_RoHS_L_4.pdf, ComponentLink2Description=http://www.vishay.com/doc?20035, ComponentLink2URL=http://www.vishay.com/doc?20035, Material="Thick Film", SCDType=spec, Supplier 1=Digi-Key, Supplier 2=Digi-Key, Supplier Part Number 2=541-10KGCT-ND
R2 R3 R5 R6 R7 R8 R9: library part RES_2K2_0603_5%, "Resistor SMD chip 2.2k Ohm 0.1W 5% 0603", Manufacturer 1=Yageo, Manufacturer 2="Samsung Electro-Mechanics America, Inc", Manufacturer 3="Stackpole Electronics Inc", Manufacturer 4="Rohm Semiconductor", Manufacturer 5="Panasonic Electronic Components", Manufacturer Part Number 1=RC0603JR-072K2L, Manufacturer Part Number 2=RC1608J222CS, Manufacturer Part Number 3=RMCF0603JT2K20, Manufacturer Part Number 4=MCR03ERTJ222, Manufacturer Part Number 5=ERJ-3GEYJ222V, Package / Case="0603 (1608 metric)", Ratings="1/10 W", Supplier Part Number 1=311-2.2KGRDKR-ND, Temperature Coefficient=±100ppm/°C, Tolerance=±5%, ComponentLink1Description=http://www.yageo.com/documents/recent/PYu-RC0603_51_RoHS_L_4.pdf, ComponentLink1URL=http://www.yageo.com/documents/recent/PYu-RC0603_51_RoHS_L_4.pdf, ComponentLink2Description=http://www.samsungsem.com/servlet/FileDownload?filename=productcatalog/pdf/Chip_Resistor.pdf, ComponentLink2URL=http://www.samsungsem.com/servlet/FileDownload?filename=productcatalog/pdf/Chip_Resistor.pdf, ComponentLink3Description=http://www.seielect.com/Catalog/SEI-RMCF_RMCP.pdf, ComponentLink3URL=http://www.seielect.com/Catalog/SEI-RMCF_RMCP.pdf, ComponentLink4Description=http://rohmfs.rohm.com/en/products/databook/datasheet/passive/resistor/chip_resistor/mcr_g.pdf, ComponentLink4URL=http://rohmfs.rohm.com/en/products/databook/datasheet/passive/resistor/chip_resistor/mcr_g.pdf, ComponentLink5Description=http://industrial.panasonic.com/www-cgi/jvcr13pz.cgi?E+PZ+3+AOA0001+ERJ3GEYJ222V+7+WW, ComponentLink5URL=http://industrial.panasonic.com/www-cgi/jvcr13pz.cgi?E+PZ+3+AOA0001+ERJ3GEYJ222V+7+WW, Material="Thick Film", RoHS 1="RoHS Compliant", RoHS 2="RoHS Compliant", RoHS 3="RoHS Compliant", RoHS 4="RoHS Compliant", RoHS 5="RoHS Compliant", SCDType=spec, Supplier 1=Digi-Key, Supplier 2=Digi-Key, Supplier 3=Digi-Key, Supplier 4=Digi-Key, Supplier 5=Digi-Key, Supplier Part Number 2=1276-5070-6-ND, Supplier Part Number 3=RMCF0603JT2K20DKR-ND, Supplier Part Number 4=RHM2.2KCGDKR-ND, Supplier Part Number 5=P2.2KGDKR-ND
R11: library part RES_330R_0603_5%, "Resistor SMD chip 330 Ohm 0.1W 5% 0603", Manufacturer 1="Vishay Dale", Manufacturer 2=Yageo, Manufacturer Part Number 1=CRCW0603330RJNEA, Manufacturer Part Number 2=RC0603JR-07330RL, Package / Case="0603 (1608 metric)", Ratings="1/10 W", Supplier Part Number 1=541-330GCT-ND, Tolerance=±5%, ComponentLink1Description=http://www.vishay.com/doc?20035, ComponentLink1URL=http://www.vishay.com/doc?20035, ComponentLink2Description=http://www.yageo.com/documents/recent/PYu-RC0603_51_RoHS_L_4.pdf, ComponentLink2URL=http://www.yageo.com/documents/recent/PYu-RC0603_51_RoHS_L_4.pdf, Material="Thick Film", SCDType=spec, Supplier 1=Digi-Key, Supplier 2=Digi-Key, Supplier Part Number 2=311-330GRCT-ND
U1: library part STM32F413xH, "STM32F413VHT symbol for FSMC application with designated FSMC relevant pins"
U3: library part ISL9014A_IRNJZ, "ISL9014A IRNJZ, Dual LDO, 3.3V and 2.8V, 300mA on both outputs"
U4: library part CH340G, "USB bus conversion chip"
XT1 XT2 XT3: library part Crystal_6MHz_HC49/US, "Resonator Ceramic 6.00 MHz 30ppm", Frequency=6MHz, Frequency Stability=±50ppm, Frequency Tolerance=±30ppm, Load Capacitance=18pF, Manufacturer 1="CTS-Frequency Controls", Manufacturer Part Number 1=ATS060BSM-1, Operating Mode=Fundamental, Operating Temperature="-20°C ~ 70°C", Package / Case=HC49/US-SM, Ratings="6.00 MHz", Supplier Part Number 1=CTX882CT-ND, ComponentLink1Description=http://www.ctscorp.com/components/Datasheets/008-0309-0.pdf, ComponentLink1URL=http://www.ctscorp.com/components/Datasheets/008-0309-0.pdf, Mounting Type="Surface Mount", Parameter Name="0.169\" (4.30mm)", SCDType=spec, Size / Dimension="0.437\" L x 0.190\" W (11.10mm x 4.83mm)", Supplier 1=Digi-Key, Type="MHz Crystal"

## Via types
v1: diameter 25, hole 12, Top Layer to Bottom Layer, 40 vias
v2: diameter 25, hole 12, Top Layer to GND, 13 vias
v3: diameter 25, hole 12, Top Layer to 3.3V, 9 vias
v4: diameter 35, hole 20, Top Layer to GND, 4 vias
v5: diameter 35, hole 20, Top Layer to 3.3V, 3 vias

## Nets (pads, with @x,y where several pads share a name; then routed paths per layer and width w, separated by ;. In a path a pad name is that pad's centre, name@x,y a point inside that pad or via, vN(x,y) a via of type N, cw(c..) or ccw(c..) an arc to the next point about the centre after c; other vN are vias at no path point)
2.8V: C3.1 C8.1 J1.8 J1.40 J1.41 J1.42 U3.9 | length 714.1
  Top Layer w10: 506.3,255 J1.42 ; 525.98,255 J1.41 ; 545,255 545,289.33 J1.40 545.67,361.1 C3.1 ; 1175.07,245 J1.8 ; 1724.69,269.69 U3.9
  Top Layer w20: v3(465,190) 465,213.7 506.3,255 525.98,255 545,255 ; 1175.07,245 1175.6,208.84 1195,189.44 v5(1195,150)
  Top Layer w25: v5(1620,145) C8.1@1674.57,145 ; C8.1 C8.1@1674.57,145 ; 1724.69,269.69 1709.69,269.69 1695,255 1695,185 1674.57,164.57 C8.1@1674.57,145
3.3V: C9.1 C17.1 C22.1 C23.1 C24.1 C25.1 C26.1 C27.1 C28.1 C29.1 C30.1 C31.1 C33.1 J2.10 L1.1 LED3.A Q1.3 R2.1 R3.1 R10.1 U1.11 U1.19 U1.28 U1.50 U1.75 U1.100 U3.10 U4.16 | length 3023
  Top Layer w10: 440,990 445,990 449.37,994.37 U1.11 ; U1.19 543.11,836.89 ; 555,1285 563.78,1276.22 U1.100 ; 603.15,705 U1.28 603.15,611.85 610,605 ; U1.50 1044.13,650.87 ; U1.75 1104.13,1199.13 ; U3.10 1775,289.37
  Top Layer w25: v3(245,965) 251.54,971.54 C27.1 291.97,969.57 C22.1 419.57,969.57 440,990 ; L1.1 479.57,575 C17.1 480,635 585,740 603.15,740 ; 543.11,836.89 558.11,836.89 603.15,791.85 603.15,740 ; 555,1285 550,1290 550,1370.43 C26.1 561.54,1381.97 C31.1 536.54,1485 536.54,1521.54 545,1530 769.37,1530 J2.10@784.37,1515 ; 603.15,705 603.15,740 ; 610,602.82 628.46,584.36 C28.1 628.46,461.97 C23.1 635.43,455 v3(680,455) ; v3(960,1445) R10.1 Q1.3@1038.98,1398.46 ; 1044.13,650.87 1084.13,650.87 1153.46,581.54 C29.1 1170.43,538.03 C24.1 1195.43,455 v3(1220,455) ; 1104.13,1199.13 1104.13,1234.13 1183.46,1313.46 C30.1 1298.03,1313.46 C25.1 1310.43,1315.43 v3(1350,1355) ; R2.1@1288.46,665 R3.1 v3(1350,600) ; U4.16 1670,1025 1690,1005 v3(1690,990) 1690,935 1703.46,921.54 C33.1 1753.07,921.54 LED3.A ; 1775,289.37 1816.06,330.43 C9.1 1860,350.43 v5(1860,385)
  other v3: 515,1485
5V: C12.1 C13.1 C14.1 C32.1 J4.1 R5.1 R6.1 U2.2 U3.1 | length 2244.5
  Top Layer w10: U3.1 1639.88,299.88
  Top Layer w15: J4.1 1693.82,1273.82 ; 1777.16,1252.84 1790,1240 1790,1225 1800,1215
  Top Layer w20: 1693.82,1273.82 1756.18,1273.82 1777.16,1252.84 ; 1800,1215 1818.46,1196.54 C32.1
  Top Layer w25: 1639.88,299.88 1659.57,319.57 C14.1
  Top Layer w35: C14.1 1516.46,370 1506.54,360.08 R5.1 R6.1 1497.99,240 1480,222.01 1480,80 1514.06,45.94 1987.4,45.94 2081.46,135 C13.1@2203.54,135 ; 1955.28,613.86 1962.67,606.47 U2.2@2285,606.47
  Top Layer w60: 2140,155 2140,405 U2.2
BOOT0: J2.7 R4.1 U1.94 | length 434.8
  Top Layer w10: U1.94 681.89,1321.89 695,1335 R4.1 751.54,1371.54 855,1475 925,1475 935,1485 J2.7
BOOT1: J2.6 R1.1 U1.37 | length 2902.7
  Top Layer w10: R1.1 737,572 780.31,615.31 U1.37 780,651.18 v1(780,710) ; J2.6@984.37,1515 984.37,1485.63 v1(1025,1445)
  Bottom Layer w10: v1(780,710) 780,835 980,1035 1105,1035 1405,735 1725,735 1785,795 1785,1070 1640,1215 1435,1215 1295,1355 1295,1415 1230,1480 1045,1480 1025,1460 v1(1025,1445)
D0: J1.32 U1.61 | length 1264.2
  Top Layer w10: v1(675,220) 675,223.89 703.15,252.04 J1.32 ; v1(1005,955) 1010,955 1049.37,915.63 U1.61
  Bottom Layer w10: v1(675,220) 675,195 712.61,157.39 822.39,157.39 860,195 860,820 995,955 v1(1005,955)
D1: J1.31 U1.62 | length 1235.9
  Top Layer w10: v1(715,220) 722.5,227.5 722.5,231.39 722.83,231.73 J1.31 ; v1(1005,990) 1015,990 1069.68,935.31 U1.62
  Bottom Layer w10: v1(715,220) 715,200 740.61,174.39 814.39,174.39 837,197 837,247.04 835,249.04 835,845 980,990 v1(1005,990)
D2: J1.30 U1.81 | length 1341.6
  Top Layer w10: J1.30 742.52,227.48 v1(750,220) ; U1.81 937.8,1212.2 945,1205 v1(945,1170)
  Bottom Layer w10: v1(750,220) 750,205 763.61,191.39 801.39,191.39 820,210 820,240 740,320 740,845 945,1050 v1(945,1170)
D3: J1.29 U1.82 | length 1246.8
  Top Layer w10: J1.29@762.5,290.3 J1.29 762.2,252.8 790,225 v1(790,218.89) ; v1(905,1170) 905,1210 918.11,1223.11 U1.82
  Bottom Layer w10: v1(790,218.89) 790,230 705,315 705,870 905,1070 v1(905,1170)
D4: J1.28 U1.38 | length 368.4
  Top Layer w10: J1.28 781.89,586.89 800,605 U1.38
D5: J1.27 U1.39 | length 368.4
  Top Layer w10: J1.27 801.57,581.57 819.68,599.68 U1.39
D6: J1.26 U1.40 | length 368.4
  Top Layer w10: J1.26 821.26,576.26 839.37,594.37 U1.40
D7: J1.25 U1.41 | length 368.4
  Top Layer w10: J1.25 840.94,570.94 859.06,589.06 U1.41
D8: J1.24 U1.42 | length 368.4
  Top Layer w10: J1.24 860.63,565.63 878.74,583.74 U1.42
D9: J1.23 U1.43 | length 368.4
  Top Layer w10: J1.23 880.32,555.32 898.43,573.43 U1.43
D10: J1.22 U1.44 | length 368.4
  Top Layer w10: J1.22 900,550.96 918.11,569.07 U1.44
D11: J1.21 U1.45 | length 368.4
  Top Layer w10: J1.21 919.69,539.69 937.8,557.8 U1.45
D12: J1.20 U1.46 | length 368.4
  Top Layer w10: J1.20 939.37,529.37 957.48,547.48 U1.46
D13: J1.19 U1.55 | length 683.7
  Top Layer w10: J1.19 959.06,344.06 980,365 v1(980,375) ; v1(1005,790) 1035,790 1042.52,797.52 U1.55
  Bottom Layer w10: v1(980,375) 950,375 940,385 940,745 985,790 v1(1005,790)
D14: J1.18 U1.56 | length 893.3
  Top Layer w10: J1.18 978.74,328.74 1025,375 v1(1040,375) ; v1(1005,830) 1005,825 1020,825 1027.8,817.2 U1.56
  Bottom Layer w10: v1(1005,830) 980,830 915,765 915,375 950,340 1015,340 1040,365 v1(1040,375)
D15: J1.17 U1.57 | length 1086
  Top Layer w10: J1.17 1000.2,290 1000.2,319.58 1020.63,340 1070,340 1090,360 v1(1090,375) ; v1(1005,870) 1010,870 1043.11,836.89 U1.57
  Bottom Layer w10: v1(1005,870) 975,870 890,785 890,360 935,315 1028.89,315 1090,376.11 v1(1090,375)
D+: J4.3 U4.5 | length 599.3
  Top Layer w10: 1633.39,1145 J4.3
  Top Layer w15: U4.5 1455,825 1515,885 1515,1045 1575,1105 1610,1105 1633.39,1128.39 1633.39,1145
D-: J4.2 U4.6 | length 680.8
  Top Layer w10: 1658.98,1156.02 1655,1160 1655,1235 1658.98,1238.98 J4.2
  Top Layer w15: U4.6 1490,775 1560,845 1560,1030 1600,1070 1630,1070 1658.98,1098.98 1658.98,1156.02
DC: J1.37 U1.58 | length 1769.3
  Top Layer w10: v1(545,190) 604.72,249.72 J1.37 ; v1(1005,910) 1015,910 1068.43,856.57 U1.58
  Bottom Layer w10: v1(545,190) 545,170 574.61,140.39 980.39,140.39 1240,400 1240,501.11 1237.5,503.61 1237.5,526.39 1240,528.89 1240,810 1140,910 v1(1005,910)
GND: C1.2 C2.2 C3.2 C4.2 C5.2 C6.2 C7.2 C8.2 C9.2 C10.2 C11.2 C12.2 C13.2 C14.2 C15.2 C16.2 C17.2 C18.2 C19.2 C20.2 C21.2 C22.2 C23.2 C24.2 C25.2 C26.2 C27.2 C28.2 C29.2 C30.2 C31.2 C32.2 C33.2 J1.2 J1.3 J1.7 J1.9 J1.11 J1.12 J1.13 J1.14 J1.15 J1.16 J1.33 J1.34 J1.43 J1.48 J1.49 J1.50 J1.51 J1.52 J2.9 J3.2 J3.3 J4.5 J4.SH R1.2 R4.2 R7.2 R8.2 R9.2 U1.10 U1.20 U1.27 U1.49 U1.74 U1.99 U2.1 U3.6 U4.1 | length 5614
  Top Layer w10: J1.50 348.82,345 ; J1.49 368.5,345 ; J1.48 388.19,345 ; 430,1025 440.5,1014.5 450.15,1014.5 450.59,1014.06 U1.10 ; 452.2,817.2 U1.20 ; 475,345 486.61,333.39 J1.43 ; 575,605 583.46,613.46 U1.27 ; U1.99 583.46,1298.46 595,1310 ; J1.34 663.78,255 682.07,255 683.46,256.4 J1.33 683.46,336.54 ; v2@675,375 v2(680,370) ; U1.49 1016.54,603.46 1020,600 ; 1018.11,245 J1.16 ; 1037.8,245 J1.15 ; 1057.48,245 J1.14 ; 1077.17,245 J1.13 ; 1096.85,245 J1.12 ; U1.74 1146.54,1171.54 ; 1116.54,245 J1.11 ; 1149.31,254.31 1155.91,260.91 J1.9 1155.91,330.91 1160,335 1190,335 1195.28,329.72 J1.7 1195.28,262.2 1207.48,250 ; J1.3 1274.02,250.98 1275,250 ; 1284.51,250 1294.02,250 1294.02,289.68 J1.2 ; 1750,200 1750,205 1750.12,205.12 U3.6
  Top Layer w15: 1140,245 1142.24,245 1150.43,253.19 ; 1207.48,250 1275,250 1284.51,250
  Top Layer w18: 1146.54,1171.54 1170,1195
  Top Layer w20: R4.2 773.46,1438.46 834.37,1499.37 J2.9@834.37,1515 ; v4(970,190) 970,196.89 1018.11,245 1037.8,245 1057.48,245 1077.17,245 1096.85,245 1116.54,245 1140,245
  Top Layer w25: v2(235,760) 354.57,760 C18.2 365,770.43 385.43,770.43 432.2,817.2 452.2,817.2 ; v2(245,860) 281.54,860 286.54,855 ; v2(245,1045) 251.54,1038.46 C27.2 291.97,1040.43 C22.2 414.57,1040.43 430,1025 ; v2(245,1110) 290,1110 290,1158.46 C7.2 ; J1.52 279.92,304.92 320,345 348.82,345 368.5,345 388.19,345 475,345 500,370 500,445 v2(510,455) ; C1.2 286.54,855 ; C2.2 286.54,855 ; C17.2 480,485 v2(510,455) ; 575,602.82 561.54,589.36 C28.2 561.54,461.97 C23.2 554.57,455 v2(510,455) ; 595,1310 630.43,1345.43 C26.2 628.46,1381.97 C31.2 653.46,1485 v2(675,1485) 695,1465 R4.2 ; C3.2 v2@675,375 ; 683.46,336.54 690,343.07 690,360 v2(680,370) 700,370 735,405 735,468.54 R1.2 ; C5.2 1029.57,434.57 v2(1050,455) 1074.57,455 C24.2 1086.54,493.03 C29.2 1055,555 1020,590 1020,600 ; 1170,1195 1170,1220 1196.54,1246.54 C30.2 C25.2@1298.03,1246.54 ; C21.2@1231.54,735 C21.2 1231.54,805 1225,811.54 R7.2 R8.2 1323.46,876.54 v2(1350,850) ; C4.2 1295.43,1243.94 C25.2@1298.03,1246.54 ; v4(1315,150) 1315,175 1331.57,191.57 J1.51 ; v2(1350,1245) 1350,1244.57 C25.2 C25.2@1298.03,1246.54 ; v2(1395,1075) 1398.9,1071.1 U4.1 ; C15.2 1578.59,82.94 1732.94,82.94 1745,95 1745,129.57 C8.2 C8.2@1750,130 ; v2(1690,1075) 1736.54,1075 C32.2 1745,1053.46 C33.2 ; C14.2 1745.43,385 v4(1790,385) ; C16.2@1740,769.57 C16.2 1795,769.57 ; 1750,200 C8.2@1750,130 ; v2(1795,720) 1795,769.57 ; R9.2@1820,771.54 1818.03,769.57 1795,769.57 ; C9.2 1855.43,259.57 1875,240 1875,153.54 C12.2 1805,140 v4(1800,145) 1785,130 C8.2@1750,130
I2C_SCL: J1.44 R2.2 U1.54 | length 1889.4
  Top Layer w10: v1(425,190) 425,210 466.93,251.93 J1.44 ; U1.54 1152.17,777.83
  Top Layer w15: R2.2 1256.25,635.29 1256.25,565.81 1275,547.06 1292.94,547.06 1305,535 v1(1305,515)
  Top Layer w20: 1152.17,777.83 1185,745 1185,701.54 R2.2@1221.54,665
  Bottom Layer w10: v1(425,190) 425,200 395,230 375,230 350,205 350,165 410,105 1040,105 1305,370 v1(1305,515)
I2C_SDA: J1.45 R3.2 U1.53 | length 1632.3
  Top Layer w10: v1(385,190) 385,210 400,225 410.04,225 445.46,260.42 ; 445.46,260.46 447.24,262.24 J1.45 ; U1.53 1135.87,758.15 1155,739.02 1155,735
  Top Layer w15: R3.2 1221.54,543.46 1250,515 v1(1265,515)
  Top Layer w20: 1155,735 1155,666.54 R3.2
  Bottom Layer w10: v1(385,190) 385,170 431.61,123.39 1013.39,123.39 1265,375 v1(1265,515)
JTCK: J2.2 U1.76 | length 344.6
  Top Layer w10: U1.76 1054.13,1259.13 1205,1410 1205,1465 1185,1485 J2.2
JTDI: J2.3 U1.77 | length 363.2
  Top Layer w10: U1.77 1016.54,1301.54 1030,1315 1080,1315 1170,1405 1170,1450 1135,1485 J2.3
JTDO: J2.4 U1.89 | length 559
  Top Layer w10: U1.89 780.31,1316.31 v1(785,1321) ; J2.4@1084.37,1515 1084.37,1485.63 v1(1125,1445)
  Bottom Layer w10: v1(785,1321) 785,1345 815,1375 1060,1375 1125,1440 v1(1125,1445)
JTMS: J2.1 U1.72 | length 524.4
  Top Layer w10: U1.72 1052.83,1132.17 1035,1150 1035,1190 1070,1225 1070,1240 1235,1405 J2.1
LEDA: J1.1 Q1.2 | length 3560.9
  Top Layer w15: 1315,235 J1.1@1315,289.11
  Top Layer w25: Q1.2@1071.06,1353.94 1117.13,1400 v1(1125,1400) ; v1(1255,190) 1255,200 1275,220 1300,220 1315,235
  Bottom Layer w25: v1(1125,1400) 1145,1380 1145,1320 1075,1250 305,1250 140,1085 140,200 280,60 1205,60 1255,110 v1(1255,190)
NE1: J1.38 U1.88 | length 1341.6
  Top Layer w10: v1(505,190) 505,205 525,225 550,225 585.04,260.04 J1.38 J1.38@583.26,291.78 ; v1(785,1170) 785,1200 800,1215 U1.88
  Bottom Layer w10: v1(505,190) 505,835 785,1115 v1(785,1170)
NetC15_1: C15.1 U3.4 | length 114.3
  Top Layer w10: C15.1 1566.54,185 1585,185 1610,210 1610,220 1620.32,230.32 U3.4
NetLED1_K: LED1.K R7.1 | length 68.1
  Top Layer w25: R7.1 LED1.K
NetLED2_K: LED2.K R8.1 | length 68.1
  Top Layer w25: R8.1 LED2.K
NetLED3_K: LED3.K R9.1 | length 83.1
  Top Layer w25: R9.1@1820,838.46 LED3.K
NetQ1_1: Q1.1 R10.2 R11.1 | length 157.5
  Top Layer w25: R11.1 893.46,1371.54 935,1330 990,1330 1007.56,1347.56 Q1.1@1018,1347.56
NetR5_2: R5.2 U3.2 | length 81
  Top Layer w10: R5.2 1608.78,269.69 U3.2
NetR6_2: R6.2 U3.3 | length 70.6
  Top Layer w10: R6.2 1600,240 1610,250 U3.3
NJTRST: J2.5 U1.90 | length 583.5
  Top Layer w10: v1(740,1321) 760.63,1300.37 U1.90 ; J2.5 1035.63,1484.37 v1(1075,1445)
  Bottom Layer w10: v1(740,1321) 740,1370 770,1400 1050,1400 1075,1425 v1(1075,1445)
NOE: J1.35 U1.85 | length 1278.9
  Top Layer w10: v1(625,190) 625,198.89 644.09,217.99 J1.35 ; U1.85 859.06,1210.94 865,1205 v1(865,1170)
  Bottom Layer w10: v1(625,190) 625,850 865,1090 v1(865,1170)
NRST: C16.1 J1.10 J2.8 U1.14 U4.13 | length 4452.8
  Top Layer w10: U1.14 550.32,935.31 v1(575,960) ; J2.8@885,1515 885,1535 900,1550 1295,1550 1380,1465 1380,1175 1420,1135 v1(1500,1135) ; J1.10 1136.22,371.22 v1(1140,375) 1165,400 1380,400 1420,440 1890,440 1925,475 1925,575 1885,615 1745,615 1690,670 v1(1690,805)
  Top Layer w25: U4.13 1665,875 1699.57,840.43 ; v1(1690,805) 1690,830 1699.57,839.57 1699.57,840.43 ; C16.1@1740,840.43 1699.57,840.43
  Bottom Layer w10: v1(575,960) 575,1030 745,1200 1040,1200 1435,805 1560,805 ; v1(1500,1135) 1535,1135 1560,1110 1560,805 ; v1(1690,805) 1560,805
NWE: J1.36 U1.86 | length 1290.8
  Top Layer w10: v1(585,190) 585,195 624.41,234.41 J1.36 ; v1(825,1170) 825,1200 839.37,1214.37 U1.86
  Bottom Layer w10: v1(585,190) 585,865 825,1105 v1(825,1170)
PC14: C7.1 U1.8 XT2.2 | length 660.4
  Top Layer w10: XT2.2@95,1437.32 242.68,1437.32 373.46,1306.54 C7.1 380,1175 425,1130 425,1115 455,1085 455,1060 461.57,1053.43 U1.8
PC15: C6.1 U1.9 XT2.1 | length 475.9
  Top Layer w10: XT2.1@95,1102.68 122.68,1075 333.31,1075 353.46,1095.16 353.46,1110 C6.1 395,1110 435,1070 435,1055 456.26,1033.74 U1.9
PH0: C1.1 U1.12 XT1.1 | length 514.7
  Top Layer w10: XT1.1@95,812.32 217.68,935 318.46,935 C1.1 415,900 428,913 428,943 457.91,972.91 494.09,972.91 U1.12
PH1: C2.1 U1.13 XT1.2 | length 741
  Top Layer w10: XT1.2@95,477.68 180,562.68 180,760 220,800 338.46,800 C2.1 390,835 445,890 445,935.87 464.13,955 U1.13
Q1: R11.2 U1.83 | length 254.2
  Top Layer w10: R11.2@885,1440 870,1440 835,1405 835,1335 850,1320 880,1320 898.43,1301.57 U1.83
RX: LED2.A U1.69 U4.3 | length 604
  Top Layer w10: U1.69 1143.11,1073.11 1155,1085
  Top Layer w20: 1155,1085 1185,1115 1280,1115 1280,1110 1420,1110 1465,1065 1465,960 1430,925 U4.3 ; LED2.A 1300,1095
TX: LED1.A U1.68 U4.2 | length 371.4
  Top Layer w10: U1.68 1160,1053.43
  Top Layer w15: LED1.A 1258.46,1045 1335,1045 1350,1030 1350,990 1365,975 U4.2
  Top Layer w20: 1160,1053.43 1199.96,1053.43 LED1.A
USBID: J4.4 U1.24 | length 1916.9
  Top Layer w10: v1(430,670) 450,690 450,730 458.46,738.46 U1.24 ; v1(1500,1090) 1505,1090 1550,1135 1590,1135 1613.89,1158.89 1613.89,1231.11 1607.8,1237.2 J4.4
  Bottom Layer w10: v1(430,670) 405,695 405,930 695,1220 1160,1220 1290,1090 v1(1500,1090)
VCAP1: C5.1 U1.48 | length 148.3
  Top Layer w10: C5.1 990,610 996.85,616.85 U1.48
VCAP2: C4.1 U1.73 | length 127
  Top Layer w10: U1.73 1105.45,1150.54 1210.1,1150.54 C4.1@1224.57,1165
VDDA: C18.1 C19.1 L1.2 U1.21 U1.22 | length 402.4
  Top Layer w10: 447.83,777.83 U1.22 U1.21
  Top Layer w25: L1.2 265.94,667.48 288.46,690 355.43,690 365,699.57 394.57,699.57 420,725 420,750 447.83,777.83
VIN: C10.1 C11.1 J3.1 U2.3 | length 887.1
  Top Layer w60: U2.3 2065,950 1978.54,1036.46 C10.1 1975,1058.54 C11.1 2041.46,1340 2205,1340 2260,1285 2260,1170.24 J3.1
XI: C20.1 U4.7 XT3.1 | length 644.5
  Top Layer w25: C20.1 1330,810 1350,790 1350,750 1375,725 U4.7 1470,725 1650,545 1767.32,545 XT3.1@1797.32,515
XO: C21.1 U4.8 XT3.2 | length 313.8
  Top Layer w25: C21.1 1363.46,675 U4.8 1398.9,631.1 1462.68,567.32 XT3.2@1462.68,515
pads on no net: C1.0 C2.0 C3.0 C4.0 C5.0 C6.0 C7.0 C8.0 C9.0 C10.0 C11.0 C12.0 C13.0 C14.0 C15.0 C16.0 C17.0 C18.0 C19.0 C20.0 C21.0 C22.0 C23.0 C24.0 C25.0 C26.0 C27.0 C28.0 C29.0 C30.0 C31.0 C32.0 C33.0 J1.4 J1.5 J1.6 J1.39 J1.46 J1.47 J3.MH J4.0 L1.0 LED1.0 LED2.0 LED3.0 Q1.0 R1.0 R2.0 R3.0 R4.0 R5.0 R6.0 R7.0 R8.0 R9.0 R10.0 R11.0 U1.1 U1.2 U1.3 U1.4 U1.5 U1.6 U1.7 U1.15 U1.16 U1.17 U1.18 U1.23 U1.25 U1.26 U1.29 U1.30 U1.31 U1.32 U1.33 U1.34 U1.35 U1.36 U1.47 U1.51 U1.52 U1.59 U1.60 U1.63 U1.64 U1.65 U1.66 U1.67 U1.70 U1.71 U1.78 U1.79 U1.80 U1.84 U1.87 U1.91 U1.92 U1.93 U1.95 U1.96 U1.97 U1.98 U3.5 U3.7 U3.8 U4.4 U4.9 U4.10 U4.11 U4.12 U4.14 U4.15 XT1.0 XT2.0 XT3.0

## Polygon pours and split planes (outlines as drawn)
GND on Top Layer "GND" (solid, pour order 0): 1805,1295 1805,1245 1830,1220 1865,1220 1889.86,1244.86 1915,1245 1940,1220 1940,1165 1940,1160 2170,930 2170,795 2325,640 2375,640 2400,615 2400,240 2375,215 2330,215 2310,195 2310,70 2330,50 2445,50 2465,70 2465,1500 2445,1520 1825,1520 1805,1500
GND on Top Layer "GND" (solid, pour order 2): 1390,1500 1400,1510 1465,1510 1475,1500 1475,1320 1485,1310 1585,1310 1595,1300 1595,1240 1605,1230 1605,1170 1595,1160 1410,1160 1390,1180
5V on Top Layer "5V" (solid, pour order 4): 1805,1095 1900,1095 1920,1075 1920,1010 1935,995 1955,995 2015,935 2015,805 2050,770 2145,770 2330,585 2225,585 1965.64,579.36 1870,675 1870,960 1850,980 1850,1010 1835,1025 1805,1025
GND on GND (split plane): 2449.9,20.1 20.1,20.1 20.1,1549.9 1449.9,1549.9 1449.9,1535 1450.29,1531.08 1450.9,1529.06 1450.9,1353.94 1450.29,1351.92 1449.9,1348 1449.9,1305 1450.29,1301.08 1451.43,1297.31 1453.29,1293.83 1455.79,1290.79 1458.83,1288.29 1462.31,1286.43 1466.08,1285.29 1470,1284.9 1795,1284.9 1798.92,1285.29 1802.69,1286.43 1806.17,1288.29 1809.21,1290.79 1811.71,1293.83 1813.57,1297.31 1814.71,1301.08 1815.1,1305 1815.1,1549.9 2449.9,1549.9
2.8V on 3.3V (split plane): 1444.9,302.89 1444.9,260 1445.29,258.05 1446.4,256.4 1506.4,196.4 1508.05,195.29 1510,194.9 1682.89,194.9 1704.9,172.89 1704.9,102.11 1682.89,80.1 222.11,80.1 200.1,102.11 200.1,302.89 222.11,324.9 1422.89,324.9
3.3V on 3.3V (split plane): 2449.9,20.1 20.1,20.1 20.1,1549.9 1449.9,1549.9 1449.9,1535 1450.29,1531.08 1450.9,1529.06 1450.9,1353.94 1450.29,1351.92 1449.9,1348 1449.9,1305 1450.29,1301.08 1451.43,1297.31 1453.29,1293.83 1455.79,1290.79 1458.83,1288.29 1462.31,1286.43 1466.08,1285.29 1470,1284.9 1795,1284.9 1798.92,1285.29 1802.69,1286.43 1806.17,1288.29 1809.21,1290.79 1811.71,1293.83 1813.57,1297.31 1814.71,1301.08 1815.1,1305 1815.1,1549.9 2449.9,1549.9

## Other copper
3.3V (plane layer: these items are gaps in the copper):
  lines w10: 195,100 220,75 1685,75 1710,100 1710,175 1685,200 1510,200 1450,260 1450,305 1425,330 525,330 220,330 195,305 195,100